# Altium PCB BUNE.PcbDoc (part 1 of 2)
Units mm, origin at the board's own origin, x right, y up, seen from the top; angles counter-clockwise.
Board outline 148 x 105 mm, 2 copper layers (Top Layer, Bottom Layer); 132 components, 91 nets, 460 pads, 94 vias.
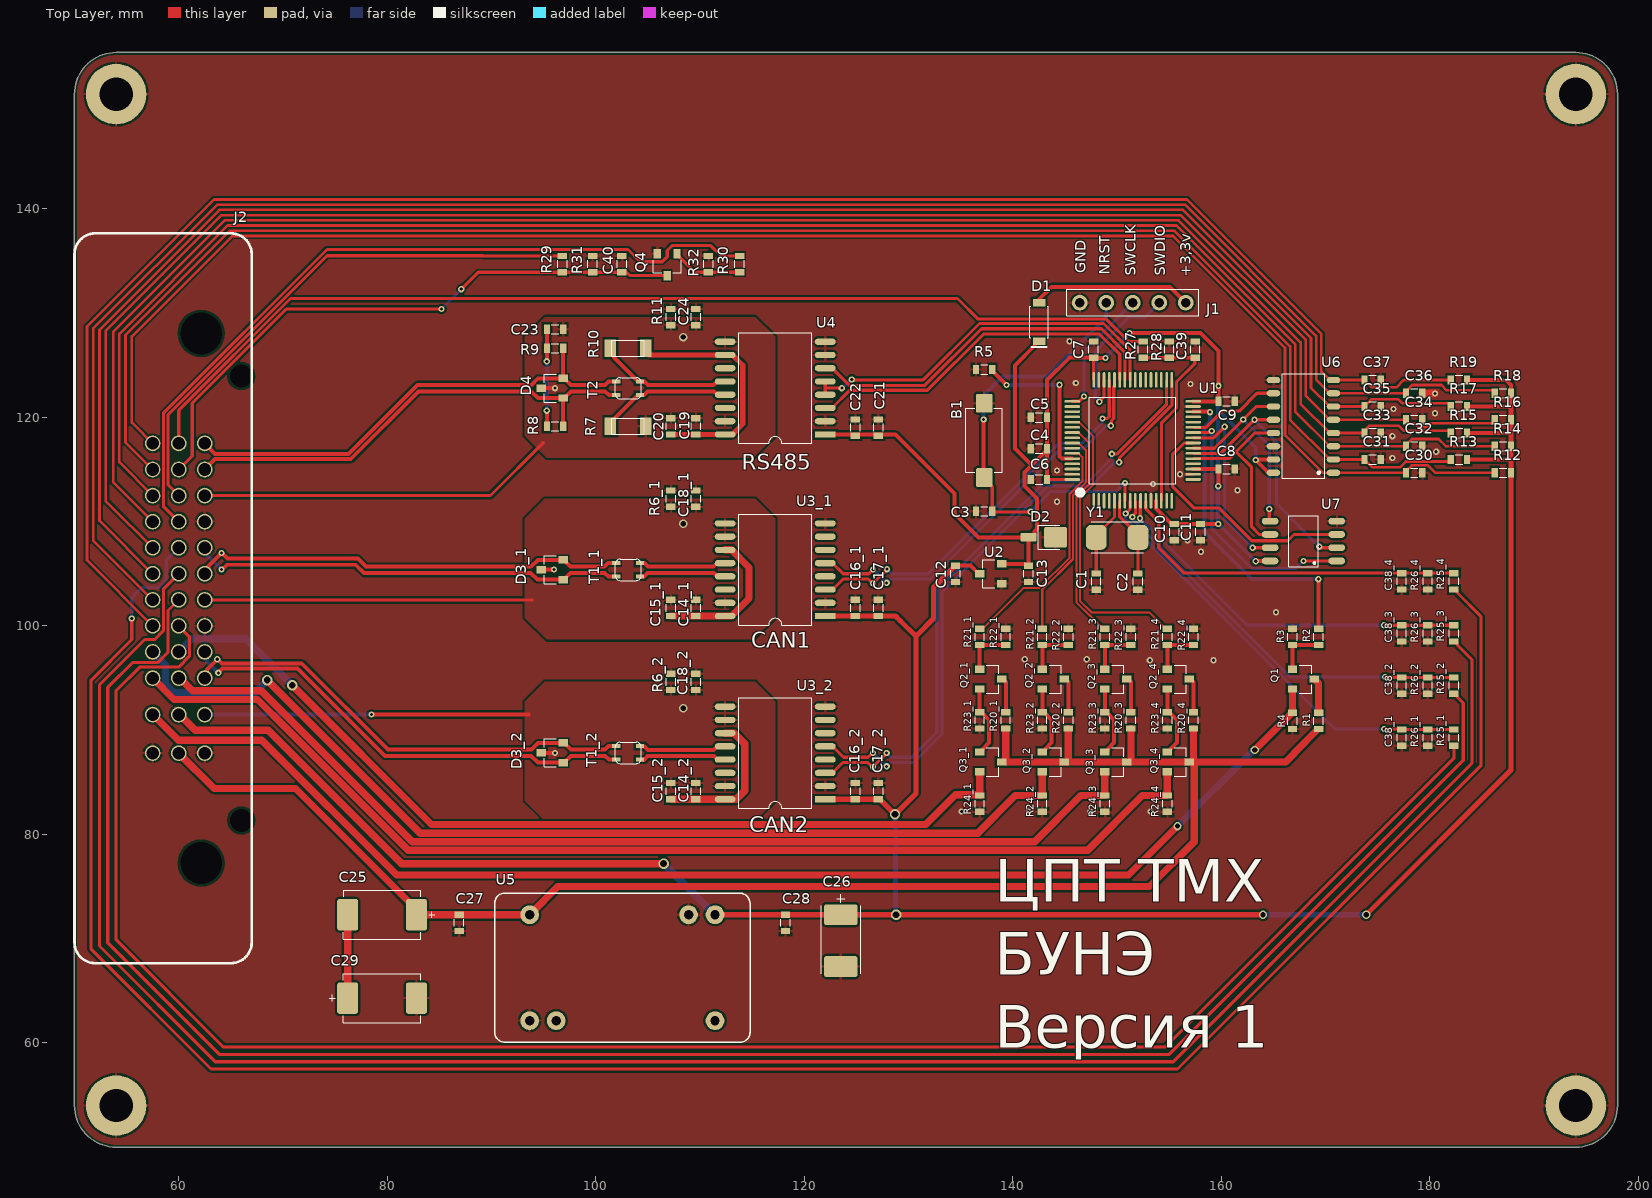
[diagram p0: Top Layer view]
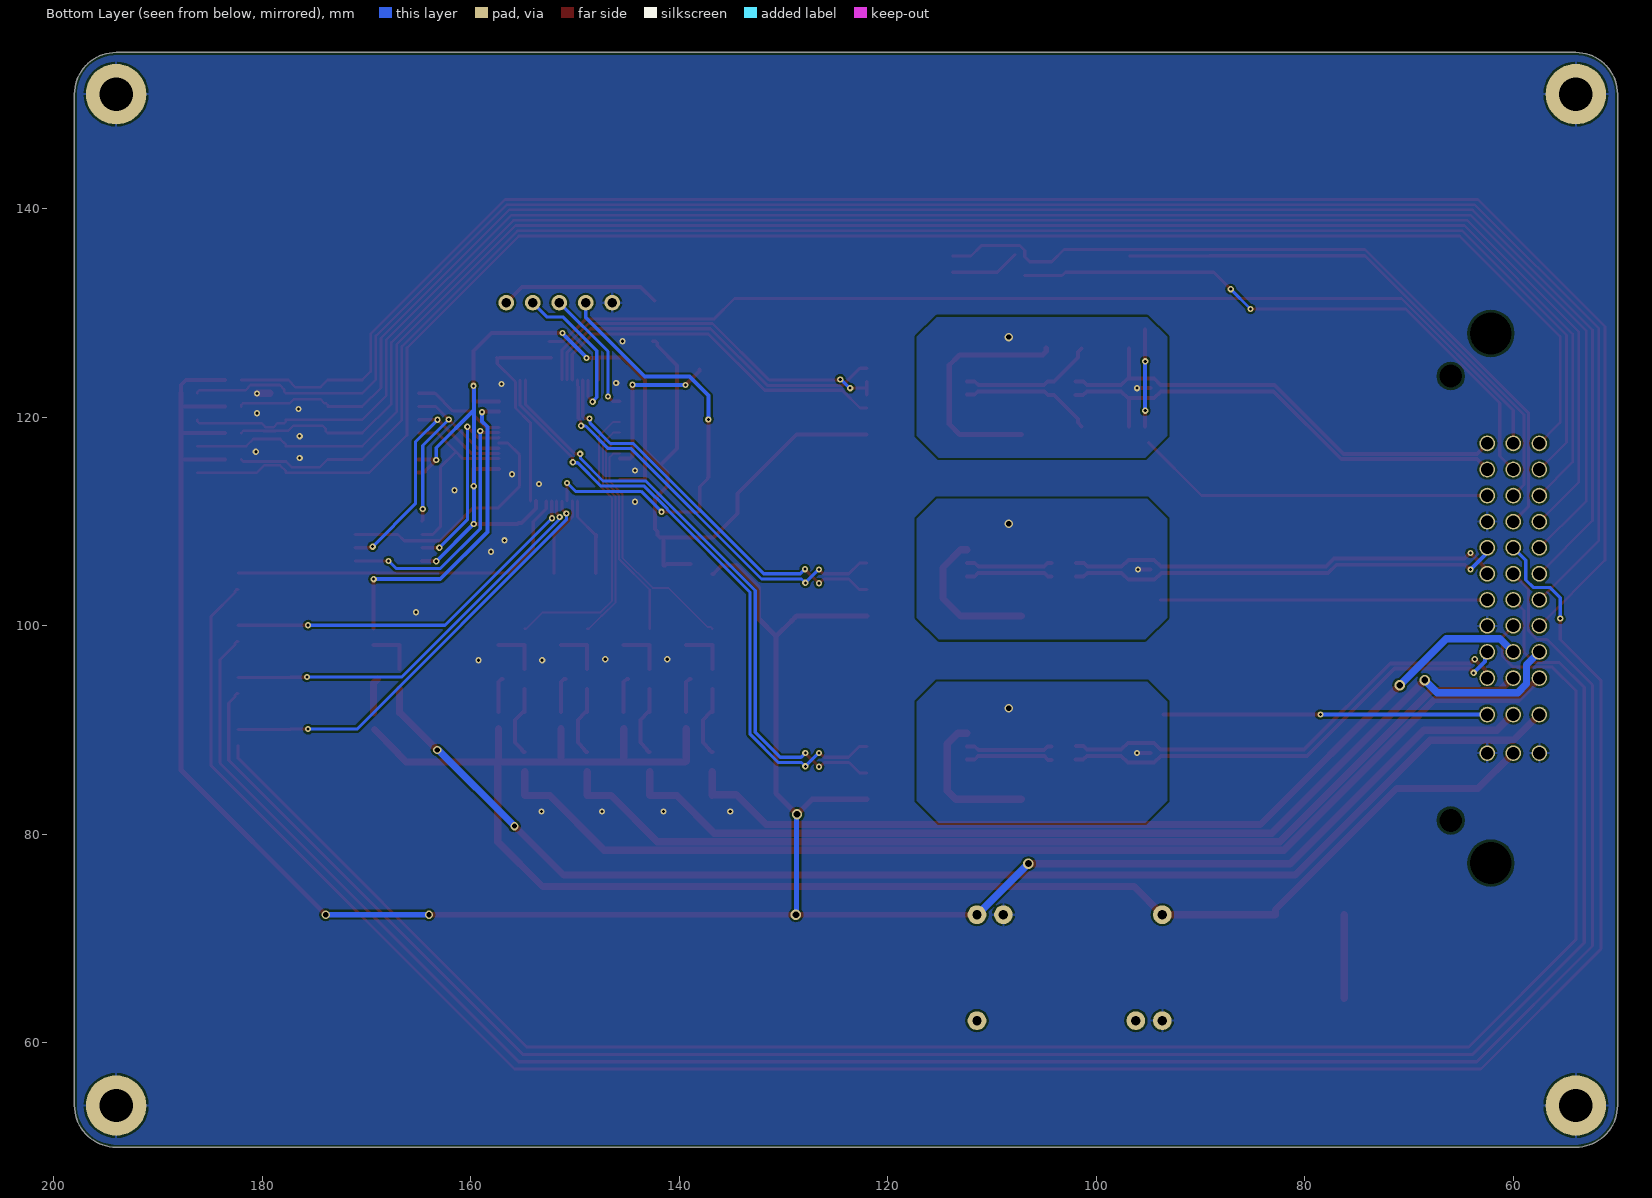
[diagram p1: Bottom Layer view, seen from below]
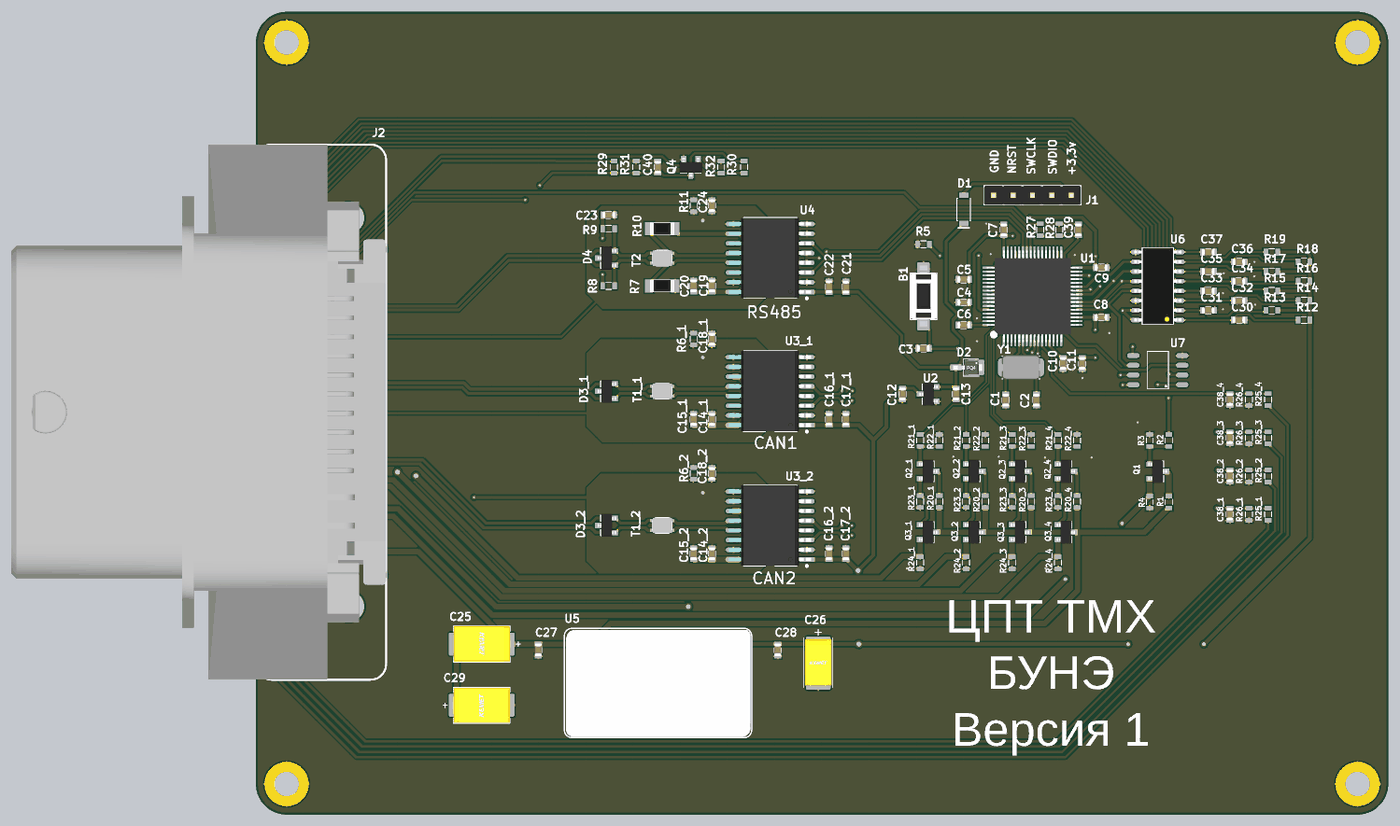
[diagram p2: 3D render of the assembled board from above, using the file's embedded part models]

## Layer stack, top to bottom
Top Solder: solder mask 0.0102, Solder Resist, Dk 3.5
Top Layer: signal copper 0.0356
Dielectric 1: dielectric 0.32, FR-4, Dk 4.8
Bottom Layer: signal copper 0.0356
Bottom Solder: solder mask 0.0102, Solder Resist, Dk 3.5

## Board outline
50,54 50,151 cw(c54,151) 54,155 194,155 cw(c194,151) 198,151 198,54 cw(c194,54) 194,50 54,50 cw(c54,54)

## Design rules (kind name [scope] priority, off if disabled: settings)
AcuteAngle [All] p1: minimum=3.50000000000000E+0001 checktracksonly=FALSE
BoardOutlineClearance "BoardOutlineClearance 1" [All] p1: gap=0.25 ignorepadtopadclearanceinfootprint=FALSE except(0: Arc-SplitContinuation Track-SplitContinuation SMDPad-SplitContinuation THPad-SplitContinuation Via-SplitContinuation Fill-SplitContinuation Poly-SplitContinuation Region-SplitContinuation Text-SplitContinuation) // Milling
Clearance "Clearance-1 1/2 Oz" [All] p1: gap=0.125 ignorepadtopadclearanceinfootprint=FALSE except(0.2: Arc-Fill Arc-Poly Track-Fill Track-Poly SMDPad-SMDPad SMDPad-Fill SMDPad-Poly THPad-Fill THPad-Poly Via-Fill Via-Poly Fill-Fill Fill-Poly Poly-Poly Poly-Region Poly-Text; 0.25: Arc-Hole Track-Hole SMDPad-Hole THPad-Hole Via-Hole Fill-Hole Poly-Hole Region-Hole Text-Hole) // Standart
ComponentClearance [All] p1: gap=0.1 collisioncheckmode=3 verticalgap=0.1 showdistances=FALSE
DiffPairsRouting "DiffPairsRouting 1/2 Oz" [All] p1: maxlimit=0.254 minlimit=0.125 mostfreqgap=0.254 toplayer_minwidth=0.125 toplayer_maxwidth=0.381 toplayer_prefwidth=0.381 bottomlayer_minwidth=0.125 bottomlayer_maxwidth=0.381 bottomlayer_prefwidth=0.381 maxuncoupledlength=12.7
Height [All] p1 off: minheight=0 maxheight=25.4 prefheight=12.7
HoleSize "Minimum HoleSize" [IsPad] p1: absolutevalues=TRUE maxlimit=5.9 minlimit=0.6 maxpercent=80.000 minpercent=20.000
HoleSize "Minimum HoleSize VIA 1" [IsVia] p2: absolutevalues=TRUE maxlimit=5.9 minlimit=0.3 maxpercent=80.000 minpercent=20.000 // Standart
HoleToHoleClearance Hole2HoleClearance [All] p1: gap=0.25 allowstackedmicrovias=FALSE
MinimumAnnularRing "Minimum AR VIA Standart" [All] p1: minimumring=0.15
MinimumAnnularRing "Minimum AR PAD Standart" [All] p2: minimumring=0.2
MinimumSolderMaskSliver "SolderMask Bridge Standart" [All] p1: minsoldermaskwidth=0.15 // All Masks
PlaneClearance "PlaneClearance-1 1/2 Oz" [All] p1: clearance=0.2 // Standart
PlaneConnect "TermalConnect-1 1/2 Oz" [All] p1: planeconnectstyle=Relief reliefexpansion=0.2 reliefentries=4 reliefconductorwidth=0.2 reliefairgap=0.2 // Standart
PolygonConnect "PolygonConnect-1 1/2 Oz" [All] p1: thpad.connectstyle=Relief thpad.reliefconductorwidth=0.254 thpad.reliefentries=4 thpad.polygonreliefangle="90 Angle" thpad.airgapwidth=0.2 smdpad.connectstyle=Relief smdpad.reliefconductorwidth=0.254 smdpad.reliefentries=4 smdpad.polygonreliefangle="90 Angle" smdpad.airgapwidth=0.2 via.connectstyle=Direct via.reliefconductorwidth=0.254 via.reliefentries=4 via.polygonreliefangle="90 Angle" via.airgapwidth=0.254 // Standart
RoutingCorners [All] p1 off: cornerstyle=45-Degree minsetback=2.54 maxsetback=2.54
RoutingVias [All] p1: holewidth=0.4 width=0.8 viastyle="Through Hole" minholewidth=0.3 minwidth=0.6 maxholewidth=5.9 maxwidth=8.9
SilkToSilkClearance Silk2SilkClearance [All] p1 off: silktosilkclearance=0.15
SilkToSolderMaskClearance Silk2SolderMaskClearance [IsPad] p1 off: minsilkscreentomaskgap=0.15 clearancetoexposedcopper=TRUE
SolderMaskExpansion SolderMaskExpansion-1 [All] p1: expansion=0.05 istentingtop=FALSE // Standart
UnRoutedNet [All] p1: checkbadconnections=TRUE
Width "Width 1/2 Oz" [All] p1: maxlimit=10 minlimit=0.125 preferedwidth=0.254 checkconnectedcopper=TRUE
18 further rules are at their usual default settings.

## Classes and differential pairs
net class CAN_L[1..2]: CAN_L1 CAN_L2
net class CAN_H[1..2]: CAN_H1 CAN_H2
channel class DigitalInput: DI1 DI2 DI3 DI4 DI5
net class DI24[1..4]: DI241 DI242 DI243 DI244
net class DI3.3[1..4]: DI3.31 DI3.32 DI3.33 DI3.34
component class DI4: C38_4 R25_4 R26_4
component class DI3: C38_3 R25_3 R26_3
component class DI2: C38_2 R25_2 R26_2
component class DI1: C38_1 R25_1 R26_1
channel class DigitalOut: DO1 DO2 DO3 DO4 DO5
channel class CAN: CAN1 CAN2
net class GND_CAN[1..2]: GND_CAN1 GND_CAN2
net class Gate[1..4]: Gate1 Gate2 Gate3 Gate4
net class DO[1..4]: DO1 DO2 DO3 DO4
net class CAN_TX[1..2]: CAN_TX1 CAN_TX2
net class CAN_RX[1..2]: CAN_RX1 CAN_RX2
component class Flash: U7
component class DO4: Q2_4 Q3_4 R20_4 R21_4 R22_4 R23_4 R24_4
component class DO3: Q2_3 Q3_3 R20_3 R21_3 R22_3 R23_3 R24_3
component class DO2: Q2_2 Q3_2 R20_2 R21_2 R22_2 R23_2 R24_2
component class DO1: Q2_1 Q3_1 R20_1 R21_1 R22_1 R23_1 R24_1
component class CAN2: C14_2 C15_2 C16_2 C17_2 C18_2 D3_2 R6_2 T1_2 U3_2
component class CAN1: C14_1 C15_1 C16_1 C17_1 C18_1 D3_1 R6_1 T1_1 U3_1
component class BUS1: C19 C20 C21 C22 C23 C24 D4 R7 R8 R9 R10 R11 T2 U4
component class ADC: C30 C31 C32 C33 C34 C35 C36 C37 R12 R13 R14 R15 R16 R17 R18 R19 U6
net class TEMP[1..8]: TEMP1 TEMP2 TEMP3 TEMP4 TEMP5 TEMP6 TEMP7 TEMP8
component class Main: C25 C26 C27 C28 C29 C40 J2 Q4 R29 R30 R31 R32 U5
component class MCU: B1 C1 C2 C3 C4 C5 C6 C7 C8 C9 C10 C11 C12 C13 C39 D1 D2 J1 Q1 R1 R2 R3 R4 R5 R27 R28 U1 U2 Y1

## Components (designator, comment, footprint, x,y, rotation, side; value= is the part's Value field where it differs from the comment)
B1 "But" "BUTTON 6x3.5" 137.25,121.355 r0 top
C1 "10pF" "0603 Capicator" 148,104.25 r270 top
C2 "10pF" "0603 Capicator" 152,104.25 r270 top
C3 "0.1uF" "0603 Capicator" 137.25,110.993 r180 top
C4 "4.7uF" "0603 Capicator" 142.5,117 r0 top
C5 "0.1uF" "0603 Capicator" 142.5,120 r0 top
C6 "0.1uF" "0603 Capicator" 142.5,114.043 r0 top
C7 "0.1uF" "0603 Capicator" 147.75,126.5 r270 top
C8 "0.1uF" "0603 Capicator" 160.5,115.043 r180 top
C9 "0.1uF" "0603 Capicator" 160.5,121.543 r180 top
C10 "10nF" "0603 Capicator" 155.5,109 r90 top
C11 "1uF" "0603 Capicator" 158,109 r90 top
C12 "1uF" "0603 Capicator" 134.5,105 r90 top
C13 "1uF" "0603 Capicator" 141.5,105 r90 top
C14_1 "0.1uF" "0603 Capicator" 109.6,101.72 r270 top (schematic designator C14)
C14_2 "0.1uF" "0603 Capicator" 109.6,84.145 r270 top (schematic designator C14)
C15_1 "10uF" "0603 Capicator" 107.2,101.72 r270 top (schematic designator C15)
C15_2 "10uF" "0603 Capicator" 107.2,84.145 r270 top (schematic designator C15)
C16_1 "0.1uF" "0603 Capicator" 124.9,101.72 r270 top (schematic designator C16)
C16_2 "0.1uF" "0603 Capicator" 124.9,84.145 r270 top (schematic designator C16)
C17_1 "10uF" "0603 Capicator" 127.1,101.72 r270 top (schematic designator C17)
C17_2 "10uF" "0603 Capicator" 127.1,84.145 r270 top (schematic designator C17)
C18_1 "1nF" "0603 Capicator" 109.6,112.2 r270 top (schematic designator C18)
C18_2 "1nF" "0603 Capicator" 109.6,94.625 r270 top (schematic designator C18)
C19 "0.1uF" "0603 Capicator" 109.6,119.145 r90 top
C20 "10uF" "0603 Capicator" 107.2,119.145 r90 top
C21 "10uF" "0603 Capicator" 127.1,119.025 r270 top
C22 "0.1uF" "0603 Capicator" 124.9,119.025 r90 top
C23 "4.7uF" "0603 Capicator" 96.095,128.45 r0 top
C24 "1nF" "0603 Capicator" 109.6,129.625 r90 top
C25 "150uF" TANTAL_D_CASE 79.5,72.3 r0 top
C26 "10uF" TANTAL_C_CASE 123.5,71.1 r90 top
C27 "2.2uF" "0603 Capicator" 86.9,71.52 r90 top
C28 "10uF" "0603 Capicator" 118.2,71.52 r90 top
C29 "150uF" TANTAL_D_CASE 79.5,64.3 r180 top
C30 "4.7uF" "0603 Capicator" 178.5,114.69 r180 top
C31 "4.7uF" "0603 Capicator" 174.5,115.96 r180 top
C32 "4.7uF" "0603 Capicator" 178.5,117.23 r180 top
C33 "4.7uF" "0603 Capicator" 174.5,118.5 r180 top
C34 "4.7uF" "0603 Capicator" 178.5,119.77 r180 top
C35 "4.7uF" "0603 Capicator" 174.5,121.04 r180 top
C36 "4.7uF" "0603 Capicator" 178.5,122.31 r180 top
C37 "4.7uF" "0603 Capicator" 174.5,123.58 r180 top
C38_1 "4.7uF" "0603 Capicator" 177.3,89.28 r90 top (schematic designator C38)
C38_2 "4.7uF" "0603 Capicator" 177.3,94.28 r90 top (schematic designator C38)
C38_3 "4.7uF" "0603 Capicator" 177.3,99.28 r90 top (schematic designator C38)
C38_4 "4.7uF" "0603 Capicator" 177.3,104.28 r90 top (schematic designator C38)
C39 "4.7uF" "0603 Capicator" 157.5,126.5 r270 top
C40 "10uF" "0603 Capicator" 102.5,134.7 r270 top
D1 "Diode" sod-123 142.513,131 r270 top
D2 "TVS 3.3V" DO-216AA 143,108.5 r180 top
D3_1 "TVS" SOT-23 96.875,104.435 r90 top (schematic designator D3)
D3_2 "TVS" SOT-23 96.875,86.881 r90 top (schematic designator D3)
D4 "TVS" SOT-23 96.875,121.85 r90 top
J1 "PLS 5x1" "PLS 5x1" 146.42,131 r0 top
J2 "Conn 36" Molex_477320361 65,117.5 r270 top
Q1 "MOSFET-N" SOT-23 166.825,95.848 r270 top
Q2_1 "MOSFET-N" SOT-23 136.825,95.848 r270 top (schematic designator Q2)
Q2_2 "MOSFET-N" SOT-23 142.825,95.848 r270 top (schematic designator Q2)
Q2_3 "MOSFET-N" SOT-23 148.825,95.848 r270 top (schematic designator Q2)
Q2_4 "MOSFET-N" SOT-23 154.825,95.848 r270 top (schematic designator Q2)
Q3_1 "MOSFET-N" SOT-23 136.825,87.898 r270 top (schematic designator Q3)
Q3_2 "MOSFET-N" SOT-23 142.825,87.898 r270 top (schematic designator Q3)
Q3_3 "MOSFET-N" SOT-23 148.825,87.898 r270 top (schematic designator Q3)
Q3_4 "MOSFET-N" SOT-23 154.825,87.898 r270 top (schematic designator Q3)
Q4 "MOSFET-N" SOT-23 107.8,135.7 r180 top
R1 "1k" "0603 Resistor" 169.325,90.888 r270 top
R2 "160R" "0603 Resistor" 169.325,98.948 r270 top
R3 "2.4k" "0603 Resistor" 166.825,98.948 r270 top
R4 "3.9k" "0603 Resistor" 166.825,90.888 r90 top
R5 "3.9k" "0603 Resistor" 137.25,124.593 r180 top
R6_1 "1M" "0603 Resistor" 107.2,112.2 r270 top (schematic designator R6)
R6_2 "1M" "0603 Resistor" 107.2,94.625 r270 top (schematic designator R6)
R7 "390R" "1206 RESISTOR" 103.1,119.145 r0 top
R8 "62R" "0603 Resistor" 96.095,119.145 r0 top
R9 "62R" "0603 Resistor" 96.095,126.625 r180 top
R10 "390R" "1206 RESISTOR" 103.1,126.625 r180 top
R11 "1M" "0603 Resistor" 107.2,129.625 r90 top
R12 "300R" "0603 Resistor" 187,114.69 r0 top
R13 "300R" "0603 Resistor" 182.78,115.96 r0 top
R14 "300R" "0603 Resistor" 187,117.23 r0 top
R15 "300R" "0603 Resistor" 182.78,118.5 r0 top
R16 "300R" "0603 Resistor" 187,119.77 r0 top
R17 "300R" "0603 Resistor" 182.78,121.04 r0 top
R18 "300R" "0603 Resistor" 187,122.31 r0 top
R19 "300R" "0603 Resistor" 182.78,123.58 r0 top
R20_1 "1k" "0603 Resistor" 139.325,90.948 r270 top (schematic designator R20)
R20_2 "1k" "0603 Resistor" 145.325,90.948 r270 top (schematic designator R20)
R20_3 "1k" "0603 Resistor" 151.325,90.948 r270 top (schematic designator R20)
R20_4 "1k" "0603 Resistor" 157.325,90.948 r270 top (schematic designator R20)
R21_1 "160R" "0603 Resistor" 136.825,98.948 r270 top (schematic designator R21)
R21_2 "160R" "0603 Resistor" 142.825,98.948 r270 top (schematic designator R21)
R21_3 "160R" "0603 Resistor" 148.825,98.948 r270 top (schematic designator R21)
R21_4 "160R" "0603 Resistor" 154.825,98.948 r270 top (schematic designator R21)
R22_1 "2.4k" "0603 Resistor" 139.325,98.948 r270 top (schematic designator R22)
R22_2 "2.4k" "0603 Resistor" 145.325,98.948 r270 top (schematic designator R22)
R22_3 "2.4k" "0603 Resistor" 151.325,98.948 r270 top (schematic designator R22)
R22_4 "2.4k" "0603 Resistor" 157.325,98.948 r270 top (schematic designator R22)
R23_1 "3.9k" "0603 Resistor" 136.825,90.948 r90 top (schematic designator R23)
R23_2 "3.9k" "0603 Resistor" 142.825,90.948 r90 top (schematic designator R23)
R23_3 "3.9k" "0603 Resistor" 148.825,90.948 r90 top (schematic designator R23)
R23_4 "3.9k" "0603 Resistor" 154.825,90.948 r90 top (schematic designator R23)
R24_1 "1k" "0603 Resistor" 136.825,82.948 r90 top (schematic designator R24)
R24_2 "1k" "0603 Resistor" 142.825,82.948 r90 top (schematic designator R24)
R24_3 "1k" "0603 Resistor" 148.825,82.948 r90 top (schematic designator R24)
R24_4 "1k" "0603 Resistor" 154.825,82.948 r90 top (schematic designator R24)
R25_1 "6.8k" "0603 Resistor" 182.3,89.28 r270 top (schematic designator R25)
R25_2 "6.8k" "0603 Resistor" 182.3,94.28 r270 top (schematic designator R25)
R25_3 "6.8k" "0603 Resistor" 182.3,99.28 r270 top (schematic designator R25)
R25_4 "6.8k" "0603 Resistor" 182.3,104.28 r270 top (schematic designator R25)
R26_1 "1k" "0603 Resistor" 179.8,89.28 r90 top (schematic designator R26)
R26_2 "1k" "0603 Resistor" 179.8,94.28 r90 top (schematic designator R26)
R26_3 "1k" "0603 Resistor" 179.8,99.28 r90 top (schematic designator R26)
R26_4 "1k" "0603 Resistor" 179.8,104.28 r90 top (schematic designator R26)
R27 "6.8k" "0603 Resistor" 152.5,126.5 r90 top
R28 "1k" "0603 Resistor" 155,126.5 r270 top
R29 "560k" "0603 Resistor" 96.8,134.7 r90 top
R30 "560k" "0603 Resistor" 113.8,134.7 r90 top
R31 "100k" "0603 Resistor" 99.7,134.7 r270 top
R32 "100k" "0603 Resistor" 110.8,134.7 r270 top
T1_1 "ACM2520" ACM2520 104.25,104.725 r180 top (schematic designator T1)
T1_2 "ACM2520" ACM2520 104.25,87.172 r180 top (schematic designator T1)
T2 "ACM2520" ACM2520 104.25,122.14 r180 top
U1 "STM32F105RCT6" LQFP64 151.5,117.793 r90 top
U2 "LDO 3V" SOT-23 138.925,104.05 r90 top
U3_1 "CAN Tranciever" SOIC16W 117.2,105.3 r180 top (schematic designator U3)
U3_2 "CAN Tranciever" SOIC16W 117.2,87.725 r180 top (schematic designator U3)
U4 "RS-485" SOIC16W 117.2,122.725 r180 top
U5 "DC/DC 24/5" VDRI10(6) 93.66,62.14 r0 top
U6 "ADC 8-channel" SOIC-16 170.75,114.69 r90 top
U7 "Flash" SOIC-8-0 171.075,106.23 r180 top
Y1 "8MHz" NX5032GA 150,108.5 r180 top

## Footprints (in the part's own frame and the unit in brackets; to place one, negate y for a bottom-side part, rotate by r counter-clockwise, add the part's x,y. Pads: shape width x height; smd on the part's side, far side on the other; paste and mask are expansions set on the pad)
"0603 Capicator" [mm]
  rect 0.6x0.9 smd: 1(-0.78,0) 2(0.78,0)
  silkscreen extent -0.35,-0.45 0.35,0.45, body extent -0.82,-0.45 0.88,0.45, height 0.9
"0603 Resistor" [mm]
  rect 0.6x0.9 smd: 1(-0.78,0) 2(0.78,0)
  silkscreen extent -0.35,-0.45 0.35,0.45, body extent -0.85,-0.45 0.85,0.45, height 0.55
"1206 RESISTOR" [mm] "smd"
  rect 1.1x1.7 smd: 1(-1.7,0) 2(1.7,0)
  silkscreen extent -1.55,-0.77 1.55,0.77, body extent -1.55,-0.77 1.55,0.78, height 0.55
ACM2520 [mm]
  rect 0.8x0.4 smd: 1(0,0) 2(2.3,0) 3(0,-1.3) 4(2.3,-1.3)
  silkscreen extent -0.13,-1.68 2.4,0.38, body extent -0.11,-1.64 2.39,0.36, height 1.24
"BUTTON 6x3.5" [mm]
  rrect20% 1.6x1.8 smd: 1(0,0) 2(0,-7.125)
  silkscreen extent -1.75,-6.63 1.75,-0.48, body extent -1.75,-7.52 1.75,0.48, height 4.3
DO-216AA [mm]
  rrect20% 2.2x2 smd: 1(-1.1,0)
  rrect20% 1.5x0.8 smd: 2(1.5,0)
  silkscreen extent -1.5,-1.15 0.58,1.15, body extent -1.91,-0.93 1.85,0.98, height 1.02
LQFP64 [mm]
  oval 1.5x0.254 smd paste+0 mask+0.02: 1(-5.8,3.75) 2(-5.8,3.25) 3(-5.8,2.75) 4(-5.8,2.25) 5(-5.8,1.75) 6(-5.8,1.25) 7(-5.8,0.75) 8(-5.8,0.25) 9(-5.8,-0.25) 10(-5.8,-0.75) 11(-5.8,-1.25) 12(-5.8,-1.75) 13(-5.8,-2.25) 14(-5.8,-2.75) 15(-5.8,-3.25) 16(-5.8,-3.75) 33(5.8,-3.75) 34(5.8,-3.25) 35(5.8,-2.75) 36(5.8,-2.25) 37(5.8,-1.75) 38(5.8,-1.25) 39(5.8,-0.75) 40(5.8,-0.25) 41(5.8,0.25) 42(5.8,0.75) 43(5.8,1.25) 44(5.8,1.75) 45(5.8,2.25) 46(5.8,2.75) 47(5.8,3.25) 48(5.8,3.75)
  oval 0.254x1.5 smd paste+0 mask+0.02: 17(-3.75,-5.8) 18(-3.25,-5.8) 19(-2.75,-5.8) 20(-2.25,-5.8) 21(-1.75,-5.8) 22(-1.25,-5.8) 23(-0.75,-5.8) 24(-0.25,-5.8) 25(0.25,-5.8) 26(0.75,-5.8) 27(1.25,-5.8) 28(1.75,-5.8) 29(2.25,-5.8) 30(2.75,-5.8) 31(3.25,-5.8) 32(3.75,-5.8) 49(3.75,5.8) 50(3.25,5.8) 51(2.75,5.8) 52(2.25,5.8) 53(1.75,5.8) 54(1.25,5.8) 55(0.75,5.8) 56(0.25,5.8) 57(-0.25,5.8) 58(-0.75,5.8) 59(-1.25,5.8) 60(-1.75,5.8) 61(-2.25,5.8) 62(-2.75,5.8) 63(-3.25,5.8) 64(-3.75,5.8)
  silkscreen extent -5.2,-4.15 4.15,5.25, body extent -6,-6.02 6,5.98, height 1.56
Molex_477320361 [mm] "Molex PCB Header 48 pin"
  round 1.5 hole 1.2: 2A(0,-2.5) 2B(2.5,-2.5) 2C(5,-2.5) 2D(7.5,-2.5) 2E(10,-2.5) 2F(12.5,-2.5) 2G(15,-2.5) 2H(17.5,-2.5) 2J(20,-2.5) 2K(22.5,-2.5) 2L(26,-2.5) 2M(29.7,-2.5) 3A(0,-5) 3B(2.5,-5) 3C(5,-5) 3D(7.5,-5) 3E(10,-5) 3F(12.5,-5) 3G(15,-5) 3H(17.5,-5) 3J(20,-5) 3K(22.5,-5) 3L(26,-5) 3M(29.7,-5) 4A(0,-7.5) 4B(2.5,-7.5) 4C(5,-7.5) 4D(7.5,-7.5) 4E(10,-7.5) 4F(12.5,-7.5) 4G(15,-7.5) 4H(17.5,-7.5) 4J(20,-7.5) 4K(22.5,-7.5) 4L(26,-7.5) 4M(29.7,-7.5)
  round 1.524 hole 4: 4(-10.55,-2.85) 7(40.25,-2.85)
  round 1.524 hole 2.2: 5(-6.45,1) 6(36.15,1)
  silkscreen extent -20.15,-15 49.85,2, body extent -20.1,-47 49.81,2, height 27.6
NX5032GA [mm] "Crystal"
  rrect50% 2x2.4 smd: 1(-2,0) 2(2,0)
  silkscreen extent -2.5,-1.5 2.5,1.5, body extent -2.5,-1.6 2.5,1.6, height 1.5
"PLS 5x1" [mm] "Connector; Header; 5 Position"
  round 1.5 hole 0.9: 1(0,0) 2(2.54,0) 3(5.08,0) 4(7.62,0) 5(10.16,0)
  silkscreen extent -1.27,-1.27 11.43,1.27, body extent -1.28,-1.28 11.42,1.26, height 8.54
sod-123 [mm]
  rect 0.7x1.2 smd: 1(0,0) 2(3.7,0)
  silkscreen extent 0.35,-0.9 4.25,0.87, body extent 0,-0.8 3.7,0.8
SOIC16W [mm]
  rect 2x0.6 smd: 1(-4.81,4.36)
  oval 2x0.6 smd: 2(-4.81,3.09) 3(-4.81,1.82) 4(-4.81,0.55) 5(-4.81,-0.72) 6(-4.81,-1.99) 7(-4.81,-3.26) 8(-4.81,-4.53) 9(4.79,-4.53) 10(4.79,-3.26) 11(4.79,-1.99) 12(4.79,-0.72) 13(4.79,0.55) 14(4.79,1.82) 15(4.79,3.09) 16(4.79,4.36)
  round 0.5 on Top Overlay mask+0.051: ""(-4.8,5.2)
  silkscreen extent -3.5,-5.39 3.48,5.21, body extent -5.35,-5.35 5.35,5.15, height 2.65
SOIC-8-0 [mm]
  oval 1.6x0.65 smd: 1(0,0) 2(0,-1.27) 3(0,-2.54) 4(0,-3.81) 5(6.4,-3.81) 6(6.4,-2.54) 7(6.4,-1.27) 8(6.4,0)
  silkscreen extent 1.8,-4.35 4.6,0.55, body extent 0.34,-4.35 6.11,0.55, height 1.45
SOIC-16 [mm]
  oval 0.6x1.3 smd paste+0 mask+0.1: 1(0,0) 2(1.27,0) 3(2.54,0) 4(3.81,0) 5(5.08,0) 6(6.35,0) 7(7.62,0) 8(8.89,0) 9(8.89,5.75) 10(7.62,5.75) 11(6.35,5.75) 12(5.08,5.75) 13(3.81,5.75) 14(2.54,5.75) 15(1.27,5.75) 16(0,5.75)
  silkscreen extent -0.55,0.82 9.48,4.92, body extent -0.53,-0.19 9.44,5.94, height 1.78
SOT-23 [mm]
  rect 0.7x0.9 smd: 1(0,0) 2(1.9,0) 3(0.95,2.1)
  silkscreen extent -0.4,0.65 2.3,1.83, body extent -0.55,-0.17 2.45,2.23, height 1.1
TANTAL_C_CASE [mm]
  rrect20% 2x3.2 smd: 1(-3.775,0) 2(1.2,0)
  silkscreen extent -4.45,-1.9 3.15,1.88, body extent -4.35,-1.75 1.95,1.75, height 2.81
TANTAL_D_CASE [mm]
  rrect20% 2x3 smd: 1(-3.3,0) 2(3.3,0)
  silkscreen extent -3.7,-2.35 5.05,2.36, body extent -3.8,-2.28 3.8,2.32, height 3.11
VDRI10(6) [mm]
  round 1.8 hole 0.9: 1(0,0) 2(2.54,0) 8(17.78,0) 9(17.78,10.16) 10(15.24,10.16) 16(0,10.16)
  silkscreen extent -3.36,-2.07 21.14,12.23, body extent -3.12,-1.97 20.98,12.03, height 8.6

## Part data
B1: library part "Button 2 Conn", "Button 2 Conn SMD", Manufacturer="KLS electronic co ltd", Part Number=L-KLS7-TS3608-5.0-180, ComponentLink1Description=Chip&Dip, ComponentLink1URL=https://www.chipdip.ru/product/kls7-ts3608-5.0-180-td-02xa, Type=Button
C1 C2: library part "Cap 10pF (0603)", "10pF NP0 50V 5% 0603", Manufacturer="Murata Manufacturing", Part Number=GRM1885C1H100JA01D, ComponentLink1Description=Chip&Dip, ComponentLink1URL=https://www.chipdip.ru/product/grm1885c1h100j, Type=Capacitor
C3 C5 C6 C7 C8 C9 C14_1 C14_2 C16_1 C16_2 C19 C22: library part "Cap 0.1uF (0603)", "0.1uF X7R 16V 10% 0603", Manufacturer="Murata Manufacturing", Part Number=GRM188R71C104KA01D, ComponentLink1Description=Chip&Dip, ComponentLink1URL=https://www.chipdip.ru/product/grm188r71c104ka01d, Type=Capacitor
C4 C23 C30 C31 C32 C33 C34 C35 C36 C37 C38_1 C38_2 C38_3 C38_4 C39: library part "Cap 4.7uF (0603)", "4.7uF X5R 25V 10% 0603", Manufacturer="Murata Manufacturing", Part Number=GRM188R61E475KE11D, ComponentLink1Description=Chip&Dip, ComponentLink1URL=https://www.chipdip.ru/product0/9000348448, Type=Capacitor
C10: library part "Cap 10nF (0603)", "10nF X7R  100V 10% 0603", Manufacturer="Murata Manufacturing", Part Number=GRM188R72A103KA01D, ComponentLink1Description=Chip&Dip, ComponentLink1URL=https://www.chipdip.ru/product/grm188r72a103ka01d, Type=Capacitor
C11 C12 C13: library part "Cap 1uF (0603)", "1uF X5R 25V 10% 0603", Manufacturer="Murata Manufacturing", Part Number=GRM188R61E105KAADD, ComponentLink1Description=Chip&Dip, ComponentLink1URL=https://www.chipdip.ru/product/grm188r61e105k, Type=Capacitor
C15_1 C15_2 C17_1 C17_2 C20 C21 C28 C40: library part "Cap 10uF (0603)", "10uF X5R 25V 20% 0603", Manufacturer="Murata Manufacturing", Part Number=GRM188R61E106M, ComponentLink1Description=Chip&Dip, ComponentLink1URL=https://www.chipdip.ru/product/grm188r61e106m, Type=Capacitor
C18_1 C18_2 C24: library part "Cap 1nF (0603)", "X7R 1nF 100V 10% 0603", Manufacturer="Murata Manufacturing", Part Number=GRM188R72A102KA01D, ComponentLink1Description=Chip&Dip, ComponentLink1URL=https://www.chipdip.ru/product/grm188r72a102ka01d, Type=Capacitor
C25 C29: library part "Cap Tantal 150uF (SMDD)", "TECAP, 150uF, 16V, case D, 10%", Manufacturer=Vishay, Part Number=293D157X9010D2TE3, ComponentLink1Description=Chip&Dip, ComponentLink1URL=https://www.chipdip.ru/product0/8018239339, Type=Capacitor
C26: library part "Cap Tantal 10uF (SMDC)", "TECAP, 10uF, 35V, case C, 10%", Manufacturer=China, Part Number=TECAP10/35VC10, ComponentLink1Description=Chip&Dip, ComponentLink1URL=https://www.chipdip.ru/product/tecap-10-mkf-35-v-tip-c-10, Type=Capacitor
C27: library part "Cap 2.2uF (0603)", "2.2uF X5R 50V 10% 0603", Manufacturer="Murata Manufacturing", Part Number=GRM188R61H225KE11D, ComponentLink1Description=Chip&Dip, ComponentLink1URL=https://www.chipdip.ru/product/grm188r61h225ke11d-murata, Type=Capacitor
D1: library part "Diode Schottky (SOD-123)", "0.5 A, Low Forward Voltage less than 385 mV, 400 mW Power Dissipation Package", Manufacturer="ON Semiconductor", Part Number=MBR0520L, ComponentLink1Description=DataSheet, ComponentLink1URL=http://www.farnell.com/datasheets/1875336.pdf, ComponentLink2Description=Chip&Dip, ComponentLink2URL=https://www.chipdip.ru/product/mbr0520l, Type=Diode
D2: library part "TVS Diode 3.3V [SM2T]", "High peak pulse power: 200 W (10/1000 μs)", Manufacturer=STMicroelectronics, Part Number=SM2T3V3A, ComponentLink1Description=DataSheet, ComponentLink1URL=https://www.st.com/resource/en/datasheet/sm2t3v3a.pdf, ComponentLink2Description=Chip&Dip, ComponentLink2URL=https://www.chipdip.ru/product0/8283670575, Type=Diode
D3_1 D3_2 D4: library part "TVS Diode Arrays", "The SM24CANB TVS Diode Array is designed to protect automotive Controller Area Network (CAN) lines from damage due to electrostatic discharge (ESD), electrical fast transient (EFT), and other overvoltage transients.", Manufacturer=Littelfuse, Part Number=SM24CANB-02HTG, ComponentLink1Description=DataSheet, ComponentLink1URL=https://m.littelfuse.com/~/media/electronics/datasheets/tvs_diode_arrays/littelfuse_tvs_diode_array_sm24canb_datasheet.pdf.pdf, ComponentLink2Description=Chip&Dip, ComponentLink2URL=https://www.chipdip.ru/product1/8001779022, Type=Diode
J1: library part "Conn 5 (PLS)", "Header, 5-Pin"
J2: library part "Conn 36 (Molex)", "Molec 36 pin PCB Header 477320361", Manufacturer=Molex, Part Number=477320361, ComponentLink1Description=ChipDip, ComponentLink1URL=https://www.chipdip.ru/product0/8004298252, ComponentLink2Description=Promelec, ComponentLink2URL=https://www.promelec.ru/product/427663/, ComponentLink3Description=Datasheet, ComponentLink3URL=https://static.chipdip.ru/lib/848/DOC011848025.pdf, Type=Connector
Q1 Q2_1 Q2_2 Q2_3 Q2_4 Q3_1 Q3_2 Q3_3 Q3_4 Q4: library part "MOSFET-N [IRLML]", "VDS 30V,  VGS Max ± 20V, RDS 27-40mΩ,", Manufacturer="Infineon Technologies", Part Number=IRLML0030TRPBF, ComponentLink1Description=DataSheet, ComponentLink1URL=https://static.chipdip.ru/lib/300/DOC000300382.pdf, ComponentLink2Description=Chip&Dip, ComponentLink2URL=https://www.chipdip.ru/product/irlml0030trpbf, Type=Transistor
R1 R20_1 R20_2 R20_3 R20_4 R24_1 R24_2 R24_3 R24_4 R26_1 R26_2 R26_3 R26_4 R28: library part "Res 1k (0603)", "0.1W 0603 1k, 1%", Manufacturer=Taiwan, Part Number=RC0603FR-071KL, ComponentLink1Description=Chip&Dip, ComponentLink1URL=https://www.chipdip.ru/product0/9000079676, Type=Resistor
R2 R21_1 R21_2 R21_3 R21_4: library part "Res 160R (0603)", "0.1W 0603 160R, 1%", Manufacturer=Taiwan, Part Number=RC0603FR-07160RL, ComponentLink1Description=Chip&Dip, ComponentLink1URL=https://www.chipdip.ru/product/0.1w-0603-160-om-1, Type=Resistor
R3 R22_1 R22_2 R22_3 R22_4: library part "Res 2.4k (0603)", "0.1W 0603 2.4k, 1%", Manufacturer=Taiwan, Part Number=RC0603FR-072K4L, ComponentLink1Description=Chip&Dip, ComponentLink1URL=https://www.chipdip.ru/product0/9000079721, Type=Resistor
R4 R5 R23_1 R23_2 R23_3 R23_4: library part "Res 3.9k (0603)", "0.1W 0603 3.9k, 1%", Manufacturer=Taiwan, Part Number=RC0603FR-073K9L, ComponentLink1Description=Chip&Dip, ComponentLink1URL=https://www.chipdip.ru/product0/9000079726, Type=Resistor
R6_1 R6_2 R11: library part "Res 1M (0603)", "0.1W 0603 1M, 1%", Manufacturer=Taiwan, Part Number=RC0603FR-071ML, ComponentLink1Description=Chip&Dip, ComponentLink1URL=https://www.chipdip.ru/product0/9000079784, Type=Resistor
R7 R10: library part "Res 390R (1206)", "0.25W 1206 390R", Manufacturer=Taiwan, Part Number=RC1206JR-07390KL, ComponentLink1Description=Chip&Dip, ComponentLink1URL=https://www.chipdip.ru/product0/8023504304, Type=Resistor
R8 R9: library part "Res 62R (0603)", "0.1W 0603 62R, 1%", Manufacturer=Taiwan, Part Number=RC0603FR-0762RL, ComponentLink1Description=Chip&Dip, ComponentLink1URL=https://www.chipdip.ru/product0/9000079611, Type=Resistor
R12 R13 R14 R15 R16 R17 R18 R19: library part "Res 300R (0603)", "0.1W 0603 300R, 1%", Manufacturer=Taiwan, Part Number=RC0603FR-07360RL, ComponentLink1Description=Chip&Dip, ComponentLink1URL=https://www.chipdip.ru/product0/9000079629, Type=Resistor
R25_1 R25_2 R25_3 R25_4 R27: library part "Res 6.8k (0603)", "0.1W 0603 6.8k, 1%", Manufacturer=Taiwan, Part Number=RC0603FR-076K8L, ComponentLink1Description=Chip&Dip, ComponentLink1URL=https://www.chipdip.ru/product/0.1w-0603-6.8-kom-1, Type=Resistor
R29 R30: library part "Res 560k (0603)", "0.1W 0603 560k, 1%", Manufacturer=Taiwan, Part Number=RC0603FR-07560KL, ComponentLink1Description=Chip&Dip, ComponentLink1URL=https://www.chipdip.ru/product0/9000079778, Type=Resistor
R31 R32: library part "Res 100k (0603)", "0.1W 0603 100k, 1%", Manufacturer=Taiwan, Part Number=RC0603FR-07100KL, ComponentLink1Description=Chip&Dip, ComponentLink1URL=https://www.chipdip.ru/product0/9000079760, Type=Resistor
T1_1 T1_2 T2: "Common mode filters / Automotive signal line (for power train/safety)", Manufacturer=TDK, Part Number=ACM2520-301-2P-T002, ComponentLink1Description=DataSheet, ComponentLink1URL=https://product.tdk.com/system/files/dam/doc/product/emc/emc/cmf_cmc/catalog/cmf_commercial_signal_acm2520_en.pdf, ComponentLink2Description=ChipDip, ComponentLink2URL=https://www.chipdip.ru/product0/8008480337?ysclid=lw4t4jsj9a923851487, Type=Inductor
U1: "MCU ARM 256KB FLASH MEM 64-LQFP", Manufacturer=STMicroelectronics, ComponentLink1Description=DataSheet, ComponentLink1URL=https://static.chipdip.ru/lib/375/DOC011375072.pdf, ComponentLink2Description=Chip&Dip, ComponentLink2URL=https://www.chipdip.ru/product/stm32f105rct6, Part Number=STM32F105RCT6, Type=IC
U2: library part "LDO 3,3V [MCP]", "MCP1702 Low Dropout Voltage Regulator. The input operating range is specifiedfrom 2.7V to 13.2V", Manufacturer=Microchip, Part Number=MCP1702T-3002E/CB, ComponentLink1Description=DataSheet, ComponentLink1URL=https://static.chipdip.ru/lib/986/DOC003986671.pdf, ComponentLink2Description=Chip&Dip, ComponentLink2URL=https://www.chipdip.ru/product/mcp1702t-3002e-cb-microchip
U3_1 U3_2: library part TDA51SCANHC, "Isolated CAN Tranciever", Manufacturer="Mornsun Power", ComponentLink1Description=ChipDip, ComponentLink1URL=https://www.chipdip.ru/product0/8024219767, ComponentLink2Description=Datasheet, ComponentLink2URL=https://static.chipdip.ru/lib/623/DOC041623283.pdf, Part Number=TDA51SCANHC, Type=IC
U4: library part TDA51S485HC, "Isolated RS-485 Half-Duplex tranciever", Manufacturer=Mornsun, ComponentLink1Description=ChipDip, ComponentLink1URL=https://www.chipdip.ru/product0/8009281357, ComponentLink2Description=Datasheet, ComponentLink2URL=https://www.mornsun-power.com/html/pdf/TDA51S485HC.html, Part Number=TDA51S485HC, Type=IC
U5: library part VDRI10B05, "DC/DC converter 24/5 10W", Manufacturer=Voltbricks, ComponentLink2Description=Datasheet, ComponentLink2URL=https://support.voltbricks.ru/datasheets/VDRI10.pdf?1689593019, Part Number=VDRI10B05, Type=IC
U6: library part MCP3008-I/SL, "A/D converter with SPI serial interface", Manufacturer=Microchip, ComponentLink1Description=ChipDip, ComponentLink1URL=https://www.chipdip.ru/product/mcp3008-i-sl, ComponentLink2Description=Datadheet, ComponentLink2URL=https://static.chipdip.ru/lib/527/DOC011527685.pdf, Part Number=MCP3008-I/SL, Type=IC
U7: library part AT25DF32A-SH-T, "32MBit Flash memore 100 MHz", Manufacturer="Adesto Technologies", ComponentLink1Description=Dayasheet, ComponentLink1URL=https://static.chipdip.ru/lib/314/DOC000314047.pdf, ComponentLink2Description=ChipDip, ComponentLink2URL=https://www.chipdip.ru/product/at25df321a-sh-t?from=suggest_product, Part Number=AT25DF32A-SH-T, Type=IC
Y1: library part "Crystal 8MHz", "Crystal NX5032GA", Manufacturer="Nihon Dempa Kogio (NDK)", Part Number=NX5032GA-8MHz, ComponentLink1Description=Chip&Dip, ComponentLink1URL=https://www.chipdip.ru/product0/9000523954, Type=Crystal

## Free pads (board coordinates)
  round 5.8 hole 3.2: 0(54,54) 0(54,151) 0(194,54) 0(194,151)

## Via types
v1: diameter 0.6, hole 0.3, Top Layer to Bottom Layer, tented both sides, 82 vias
v2: diameter 0.8, hole 0.5, Top Layer to Bottom Layer, tented both sides, 7 vias
v3: diameter 1, hole 0.65, Top Layer to Bottom Layer, tented both sides, 5 vias

## Nets (pads, with @x,y where several pads share a name; then routed paths per layer and width w, separated by ;. In a path a pad name is that pad's centre, name@x,y a point inside that pad or via, vN(x,y) a via of type N, cw(c..) or ccw(c..) an arc to the next point about the centre after c; other vN are vias at no path point)
+3,3V: C4.2 C5.2 C6.2 C7.2 C8.2 C9.2 C10.2 C11.2 C13.2 C21.2 C22.1 D1.2 D2.2 U1.13 U1.19 U1.32 U1.48 U1.64 U2.2 U4.1 U6.15 U6.16 U7.8 | length 135.4
  Top Layer w0.3: C6.2@143.323,114.043 U1.64 ; U1.48 C7.2
  Top Layer w0.381: U4.1 128.735,118.365 134.4,112.7 134.4,110.8 136.7,108.5 D2.2 ; U2.2 141.18,105.95 141.35,105.78 C13.2 D2.2 ; 141.725,115.475 140.2,117 140.2,124.987 142.103,126.89 142.103,127.14 142.263,127.3 D1.2 ; C4.2@143.28,117.15 C4.2 C4.2@143.28,116.85 ; C4.2@143.28,117.33 C5.2 143.28,123.58 145.42,125.72 C7.2 147.76,125.71 148.89,125.71 v1(148.9,125.7) ; C6.2@143.323,114.043 143.28,114 C6.2 C4.2@143.28,116.85 ; v1(151.2,128.1) 158,128.1 159.737,126.363 v1(159.737,123.026) ; U1.13 153.75,111.244 154.067,110.927 154.073,110.927 155.111,109.889 155.39,109.889 C10.2 C11.2 158.006,109.774 159.563,109.774 v1@159.569,109.769 ; U1.19 C8.2@159.71,115.043 ; U1.32 C9.2 159.71,121.553 v1@159.71,122.99 ; v1(159.7,113.4) 159.71,113.41 C8.2@159.71,115.043 ; C8.2@159.71,115.09 C8.2@159.71,115.043 ; C8.2 C8.2@159.71,115.043 ; v1(163.3,106.2) 163.315,106.215 164.66,106.215 U7.8 ; U6.16 164.591,114.69 164.481,114.799 164.401,114.799 v1(163.3,115.9) 163.359,115.9 163.419,115.96 U6.15 ; D2.2 141.85,108.5 142.06,108.71 142.06,109.06 142.3,109.3 142.3,112.2 141.1,113.4 141.1,114.7 143.14,116.74 143.171,116.74 C4.2@143.28,116.85
  Bottom Layer w0.381: v1(148.9,125.7) 148.9,125.75 151.2,128.05 v1(151.2,128.1) ; v1@159.7,123 159.7,120.687 ; v1(163.3,106.2) 163.284,106.2 159.716,109.769 v1(159.7,109.769) v1(159.7,113.4) 159.7,120.687 ; v1(163.3,115.9) 163.3,117.087 159.7,120.687
+5V: C12.2 C16_1.2 C16_2.2 C17_1.2 C17_2.2 C26.2 C28.2 J2.3L R12.2 R13.2 R14.2 R15.2 R16.2 R17.2 R18.2 R19.2 U2.3 U3_1.1 U3_2.1 U5.9 | length 250.8
  Top Layer w0.381: C12.2 135.945,105.78 136.725,105 U2.3 ; R13.2 187.78,115.96 ; R15.2 187.78,118.5 ; R17.2 187.78,121.04 ; R19.2 187.32,123.58 187.78,123.12 R18.2
  Top Layer w0.5: U5.9 C28.2 C26.2 v3(128.8,72.3) v2(164,72.3) ; U3_2.1 C16_2.2 C17_2.2 127.25,83.365 128.69,81.925 v3(128.7,81.925) 130.7,83.925 130.7,99 ; U3_1.1 C16_1.2 C17_1.2 128.76,100.94 129.21,100.49 130.7,99 ; C12.2 132.4,103.68 132.4,100.7 130.7,99 ; v2(173.9,72.3) 187.78,86.18 R12.2 187.78,115.96 R14.2 187.78,118.5 R16.2 187.78,121.04 R18.2
  Top Layer w0.7: J2.3L@59.993,91.347 60.253,91.347 61.6,90 68.6,90 81.4,77.2 v3(106.5,77.2)
  Bottom Layer w0.5: v3(128.7,81.925) 128.75,81.875 128.75,72.35 v3(128.8,72.3) ; v2(164,72.3) v2(173.9,72.3)
  Bottom Layer w0.7: v3(106.5,77.2) 106.52,77.2 111.42,72.3 U5.9
+24V: C25.2 C27.2 J2.3M Q3_1.3 Q3_2.3 Q3_3.3 Q3_4.3 R1.2 R20_1.2 R20_2.2 R20_3.2 R20_4.2 U5.16 | length 158.8
  Top Layer w0.7: J2.3M 63.4,84.4 71.2,84.4 82.8,72.8 C25.2 C27.2 U5.16 96.36,75 153.1,75 157.4,79.3 157.4,86.948 ; R20_1.2 139.325,87.023 139.4,86.948 145.4,86.948 ; R20_2.2 145.325,87.023 145.4,86.948 ; R20_3.2 151.325,87.023 151.4,86.948 ; R20_4.2 157.325,87.023 157.4,86.948 ; R1.2@169.225,90.057 166.985,87.818 166.985,87.768 166.165,86.948 163.325,86.948 157.4,86.948 ; 145.4,86.948 151.4,86.948 ; 151.4,86.948 Q3_4.3 157.4,86.948
ACB: J2.3C R29.2 | length 52.3
  Top Layer w0.3: J2.3C 58.975,113.525 58.975,120.248 74.227,135.5 89.2,135.5 89.21,135.49 R29.2@96.8,135.49
BOOT: R5.1 U1.60 | length 15.3
  Top Layer w0.381: R5.1 138.03,124.443 139.373,123.1 v1(139.4,123.1) ; v1(144.47,123.13) 144.47,116.266 144.693,116.043 U1.60
  Bottom Layer w0.381: v1(139.4,123.1) 139.415,123.115 144.455,123.115 v1(144.47,123.13)
CAN_H1: D3_1.1 J2.2E T1_1.2 | length 41.8
  Top Layer w0.381: v1(64.1,105.4) 64.159,105.4 64.625,105.866 76.975,105.866 77.765,105.075 93.75,105.075 94.39,104.435 D3_1.1 ; D3_1.1@96.925,104.425 97.575,105.075 100.85,105.075 101.2,104.725 T1_1.2
  Bottom Layer w0.381: J2.2E 62.714,107.286 62.714,106.786 v1(64.1,105.4)
CAN_H2: D3_2.1 J2.2J T1_2.2 | length 44.9
  Top Layer w0.381: v1(63.8,95.5) 64.194,95.894 71.406,95.894 79.769,87.531 93.8,87.531 94.45,86.881 D3_2.1 ; D3_2.1@96.975,86.881 97.625,87.531 100.9,87.531 101.25,87.181 T1_2.2@102,87.181
  Bottom Layer w0.381: J2.2J 62.703,97.297 62.703,96.597 63.084,96.216 v1(63.8,95.5)
CAN_L1: D3_1.2 J2.2F T1_1.4 | length 41.7
  Top Layer w0.381: J2.2F 62.5,105.303 62.853,105.656 62.853,105.753 v1(64.1,107) 64.159,107 64.694,106.465 77.175,106.465 77.965,105.675 93.779,105.675 94.438,106.335 D3_1.2 ; D3_1.2@96.925,106.325 97.575,105.675 100.85,105.675 101.19,106.016 T1_1.4@101.94,106.016
CAN_L2: D3_2.2 J2.2K T1_2.4 | length 44.7
  Top Layer w0.381: J2.2K 62.714,95.214 62.714,95.814 v1(63.7,96.8) 63.733,96.8 64.133,96.4 71.8,96.4 80.069,88.131 93.829,88.131 94.479,88.781 D3_2.2 ; D3_2.2@96.975,88.781 97.625,88.131 100.9,88.131 101.24,88.472 T1_2.4
CAN_RX1: U1.44 U3_1.5 | length 39.3
  Top Layer w0.3: U3_1.5 122.71,106.02 123.73,105 126.19,105 v1(126.59,105.4) ; v1(149.4,119.2) 149.457,119.257 149.457,119.682 149.675,119.9 149.675,122.941 149.75,123.016 U1.44
  Bottom Layer w0.3: v1@126.61,105.42 v1(127.9,104.13) 128.27,104.5 132.1,104.5 144.6,117 146.8,117 148.97,119.17 149.37,119.17 v1(149.4,119.2)
CAN_RX2: U1.33 U3_2.5 | length 59.4
  Top Layer w0.3: U3_2.5 122.71,88.445 123.755,87.4 126.109,87.4 126.509,87.8 v1(126.59,87.8) ; v1(150.2,115.7) 150.231,115.731 150.231,116.13 155.25,121.149 U1.33
  Bottom Layer w0.3: v1@126.61,87.82 v1(127.9,86.53) 128.27,86.9 130.5,86.9 133.2,89.6 133.2,103.2 141.109,111.11 141.109,111.174 143.336,113.4 147.5,113.4 149.743,115.643 150.143,115.643 v1(150.2,115.7)
CAN_TX1: U1.45 U3_1.3 | length 38.6
  Top Layer w0.3: U3_1.3 122.71,103.48 123.73,104.5 126.124,104.5 126.554,104.07 126.57,104.07 v1(126.59,104.09) v1(127.942,105.442) ; v1(148.6,119.9) 149.074,119.9 149.25,120.076 U1.45
  Bottom Layer w0.3: v1(127.942,105.442) 128.383,105 131.9,105 144.4,117.5 146.6,117.5 148.543,119.443 148.543,119.843 v1(148.6,119.9)
CAN_TX2: U1.34 U3_2.3 | length 58.6
  Top Layer w0.3: U3_2.3 122.71,85.905 123.705,86.9 126.099,86.9 126.509,86.49 v1(126.59,86.49) ; v1@126.61,86.51 v1(127.9,87.8) ; v1(149.5,116.5) 150,116.5 154.75,121.25 U1.34
  Bottom Layer w0.3: v1(127.9,87.8) 128.3,87.4 130.3,87.4 132.7,89.8 132.7,103.4 143.2,113.9 147.3,113.9 149.47,116.07 149.47,116.47 v1(149.5,116.5)
DC/DC: J2.3D R30.2 | length 74.7
  Top Layer w0.3: J2.3D 58.525,111.475 58.525,120.399 74.226,136.1 103.09,136.1 104.265,134.925 106.385,134.925 106.85,135.39 106.85,136.01 107.315,136.475 111.015,136.475 112.01,135.48 R30.2
DI3.31: C38_1.2 R25_1.1 R26_1.2 U1.8 | length 41.9
  Top Layer w0.3: v1(150.82,110.783) 150.827,110.783 151.25,111.206 U1.8 ; v1(175.593,90.1) C38_1.2@177.3,90.1 ; C38_1.2 R26_1.2 R25_1.1
  Bottom Layer w0.3: v1(150.82,110.783) 150.82,110.18 170.9,90.1 v1@175.7,90.1
DI3.32: C38_2.2 R25_2.1 R26_2.2 U1.9 | length 39
  Top Layer w0.3: v1(151.466,110.453) 151.466,110.509 151.749,110.793 U1.9@151.749,111.992 ; v1(175.7,95.1) 175.72,95.08 177.28,95.08 C38_2.2 R26_2.2 R25_2.1
  Bottom Layer w0.3: v1(151.466,110.453) 151.523,110.396 151.523,110.177 166.6,95.1 v1(175.7,95.1)
DI3.33: C38_3.2 R25_3.1 R26_3.2 U1.10 | length 36.1
  Top Layer w0.3: v1(152.193,110.32) 152.227,110.354 152.227,111.97 U1.10 ; v1(175.593,100.06) C38_3.2 R26_3.2 R25_3.1
  Bottom Layer w0.3: v1(152.193,110.32) 162.453,100.06 v1(175.593,100.06)
DI3.34: C38_4.2 R25_4.1 R26_4.2 U1.11 | length 34.3
  Top Layer w0.3: U1.11 152.75,111.25 154,110 154,107.5 156.44,105.06 C38_4.2 R26_4.2 R25_4.1
DI241: J2.3H R25_1.2 | length 180.9
  Top Layer w0.3: J2.3H 61.025,98.975 61.025,97.075 60,96.05 56.25,96.05 54,93.8 54,69.9 64.3,59.6 154.596,59.6 182.3,87.304 R25_1.2
DI242: J2.3G R25_2.2 | length 190.1
  Top Layer w0.3: J2.3G 58.975,101.475 58.975,97.475 57.975,96.475 55.575,96.475 53.2,94.1 53.2,69.6 63.9,58.9 155,58.9 183.2,87.1 183.2,92.6 182.6,93.2 182.6,93.35 182.45,93.5 R25_2.2
DI243: J2.3F R25_3.2 | length 200
  Top Layer w0.3: J2.3F 58.525,103.525 58.525,99.525 57.7,98.7 56.751,98.7 52.4,94.349 52.4,69.3 63.5,58.2 155.4,58.2 184.043,86.843 184.043,96.757 182.6,98.2 182.6,98.35 182.45,98.5 R25_3.2
DI244: J2.3E R25_4.2 | length 211.1
  Top Layer w0.3: v1(55.5,100.7) 55.5,98.7 51.6,94.8 51.6,69 63.1,57.5 155.8,57.5 184.885,86.585 184.885,100.915 182.6,103.2 182.6,103.35 182.45,103.5 R25_4.2
  Bottom Layer w0.3: v1(55.5,100.7) 55.5,102.7 56.5,103.7 58.1,103.7 58.8,104.4 58.8,106.3 J2.3E
DO1: J2.3J Q3_1.2 R24_1.2 | length 88.2
  Top Layer w0.7: v3(70.9,94.3) 84.25,80.95 131.65,80.95 134.5,83.8 R24_1.2@136.825,83.8 ; R24_1.2 R24_1.2@136.825,83.8 ; Q3_1.2 R24_1.2@136.825,83.8
  Bottom Layer w0.7: J2.3J 61.275,98.775 66.425,98.775 v3(70.9,94.3)
DO2: J2.4J Q3_2.2 R24_2.2 | length 98.4
  Top Layer w0.7: v3(68.5,94.8) 83.175,80.125 136.625,80.125 140.228,83.728 R24_2.2 Q3_2.2
  Bottom Layer w0.7: J2.4J 58.725,96.275 58.725,94.443 59.568,93.6 67.3,93.6 v3(68.5,94.8)
DO3: J2.3K Q3_3.2 R24_3.2 | length 99.4
  Top Layer w0.7: J2.3K 60.096,95 61.321,93.775 67.925,93.775 82.4,79.3 142.1,79.3 146.528,83.728 R24_3.2 Q3_3.2
DO4: J2.4K Q3_4.2 R24_4.2 | length 108.6
  Top Layer w0.7: J2.4K 59.55,92.95 67.55,92.95 70.4,90.1 82.025,78.475 147.175,78.475 152.428,83.728 R24_4.2 Q3_4.2
Gate1: R21_1.1 U1.59 | length 22.7
  Top Layer w0.2: R21_1.1 136.975,99.878 137.278,99.878 141.045,103.645 142.545,103.645 145.45,106.55 145.45,112.652 146.675,113.877 146.675,116.191 146.341,116.525 145.718,116.525 U1.59
Gate2: R21_2.1 U1.57 | length 20.4
  Top Layer w0.2: R21_2.1 142.825,103.465 145.775,106.416 145.775,112.517 147,113.742 147,116.866 146.341,117.525 145.718,117.525 U1.57
Gate3: R21_3.1 U1.55 | length 21.6
  Top Layer w0.2: U1.55 146.323,118.543 147.325,117.541 147.325,113.608 146.1,112.383 146.1,102.281 147.406,100.975 147.428,100.975 148.675,99.728 R21_3.1
Gate4: R21_4.1 U1.53 | length 28.4
  Top Layer w0.2: U1.53 146.338,119.543 146.365,119.516 146.384,119.516 147.7,118.2 147.7,113.523 146.425,112.248 146.425,102.675 146.425,102.415 147.54,101.3 147.8,101.3 153.103,101.3 154.675,99.728 R21_4.1
GND: B1.1 C1.2 C2.2 C3.2 C4.1 C5.1 C6.1 C7.1 C8.1 C9.1 C10.1 C11.1 C12.1 C13.1 C16_1.1 C16_2.1 C17_1.1 C17_2.1 C18_1.1 C18_2.1 C21.1 C22.2 C24.2 C26.1 C27.1 C28.1 C29.1 C30.1 C31.1 C32.1 C33.1 C34.1 C35.1 C36.1 C37.1 C38_1.1 C38_2.1 C38_3.1 C38_4.1 C39.1 C40.1 D2.1 J1.1 J2.2D J2.2H J2.2M J2.4M pad.0 Q4.2 R3.1 R4.1 R5.2 R6_1.1 R6_2.1 R11.2 R22_1.1 R22_2.1 R22_3.1 R22_4.1 R23_1.1 R23_2.1 R23_3.1 R23_4.1 R24_1.1 R24_2.1 R24_3.1 R24_4.1 R26_1.1 R26_2.1 R26_3.1 R26_4.1 R28.1 R31.1 R32.1 U1.12 U1.18 U1.31 U1.47 U1.63 U2.1 U3_1.2 U3_1.8 U3_2.2 U3_2.8 U4.2 U4.7 U4.8 U5.1 U5.10 U6.9 U6.14 U7.4 | length 1.2
  Top Layer w0.7: C36.1 180.49,122.31 v1(180.5,122.3)
  other v1: 135.1,82.2 141.5,82.2 147.4,82.2 153.2,82.2 153.143,96.706 159.243,96.706 141.143,96.806 147.091,96.805 165.243,101.306 158.043,107.106 156.743,108.206 144.243,111.906 161.543,113.006 153.443,113.606 156.043,114.543 144.243,114.906 176.4,116.1 180.6,116.7 176.4,118.2 180.5,120.4 176.5,120.8 157.043,123.206 146.043,123.306 145.443,127.306
GND_CAN1: C14_1.1 C15_1.1 C18_1.2 D3_1.3 J2.2G R6_1.2 U3_1.9 U3_1.10 U3_1.15 | length 32.6
  Top Layer w0.3: J2.2G 93.9,102.5
  Top Layer w0.381: D3_1.3 94.783,105.392 95.992,105.392 v1(96,105.4)
  other v2: 108.4,109.8
GND_CAN2: C14_2.1 C15_2.1 C18_2.2 D3_2.3 J2.2L R6_2.2 U3_2.9 U3_2.10 U3_2.15 | length 32.4
  Top Layer w0.381: v1(78.5,91.5) 93.555,91.5 ; D3_2.3 94.791,87.816 96.084,87.816 v1(96.1,87.8)
  Bottom Layer w0.381: J2.2L v1(78.5,91.5)
  other v2: 108.4,92.1
GND_RS485: C19.2 C20.2 C23.2 C24.1 D4.3 J2.2C R7.2 R11.1 U4.9 U4.15 | length 35.9
  Top Layer w0.3: J2.2C 89.9,112.5 95,117.6
  Top Layer w0.381: D4.3@94.775,122.8 v1(96.1,122.8)
  other v2: 108.4,127.7
IGBT_Gate: R2.1 U1.30 | length 30.9
  Top Layer w0.381: U1.30 158.798,120.543 158.841,120.5 v1(158.9,120.5) ; v1(169.3,104.485) 169.312,104.472 169.312,99.74 R2.1
  Bottom Layer w0.381: v1(158.9,120.5) 158.9,119.6 158.4,119.1 158.4,109 162.915,104.485 v1(169.3,104.485)
IGBT_Gates: J2.4L Q1.2 R4.2 | length 124.4
  Top Layer w0.7: J2.4L 59.975,89.025 67.975,89.025 80.9,76.1 151.1,76.1 v2(155.8,80.8) ; v2(163.2,88.1) 163.207,88.1 166.775,91.668 R4.2 Q1.2
  Bottom Layer w0.7: v2(155.8,80.8) 163.081,88.081 163.181,88.081 v2(163.2,88.1)
MISO: U1.22 U6.12 U7.2 | length 25.5
  Top Layer w0.3: U1.22 159.943,116.543 v1(163.17,119.77) U6.12 ; v1(169.4,107.6) 169.481,107.6 169.581,107.5 U7.2
  Bottom Layer w0.3: v1(163.17,119.77) 165.3,117.64 165.3,111.7 v1(169.4,107.6)
MOSI: U1.23 U6.11 U7.5 | length 20.2
  Top Layer w0.3: U1.23 159.343,117.043 v1(162.1,119.8) 163.34,121.04 U6.11 ; v1(164.6,111.2) 164.6,110.115 U7.5
  Bottom Layer w0.3: v1(162.1,119.8) 164.6,117.3 v1(164.6,111.2)
NetC1_1: C1.1 U1.5 Y1.2 | length 7.7
  Top Layer w0.3: C1.1 Y1.2 ; Y1.2@148,108.7 149.75,110.45 U1.5
  Top Layer w0.381: Y1.2 Y1.2@148,108.7
NetC2_1: C2.1 U1.6 Y1.1 | length 7.7
  Top Layer w0.3: U1.6 150.245,111.988 150.245,110.455 152,108.7 Y1.1 C2.1
NetC23_1: C23.1 R8.1 R9.2 | length 9.3
  Top Layer w0.381: R8.1 v1@95.315,120.685 ; v1@95.315,125.415 R9.2 C23.1
  Bottom Layer w0.381: v1(95.301,120.643) v1(95.301,125.373)
NetC25_1: C25.1 C29.2 | length 8
  Top Layer w0.7: C29.2 C25.1
NetC39_2: C39.2 R27.1 R28.2 U1.14 | length 20.1
  Top Layer w0.3: R27.1@152.27,125.72 R28.2 C39.2@157.267,125.72 ; U1.14 154.25,119.45 155.7,120.9 155.7,123.4 157.446,125.146 157.446,125.666 C39.2
NetD1_1: D1.1 J1.5 | length 15.4
  Top Layer w0.381: D1.1@142.384,131.184 143.7,132.5 155.08,132.5 J1.5
NetQ1_1: Q1.1 R2.2 R3.2 | length 4.8
  Top Layer w0.381: Q1.1 R3.2 R2.2
NetQ1_3: Q1.3 R1.1 | length 3.4
  Top Layer w0.7: Q1.3 169.325,94.498 R1.1
NetQ2_1_1: Q2_1.1 R21_1.2 R22_1.2 | length 4.8
  Top Layer w0.381: Q2_1.1 R21_1.2 R22_1.2
NetQ2_1_2: Q2_1.2 Q3_1.1 R23_1.2 | length 6.9
  Top Layer w0.381: Q3_1.1 136.925,87.898 137.085,88.057 137.085,88.157 137.725,88.798 137.725,90.978 136.975,91.728 R23_1.2 Q2_1.2
NetQ2_1_3: Q2_1.3 R20_1.1 | length 3.4
  Top Layer w0.381: Q2_1.3 139.025,94.898 139.325,94.598 R20_1.1
NetQ2_2_1: Q2_2.1 R21_2.2 R22_2.2 | length 4.8
  Top Layer w0.381: Q2_2.1 R21_2.2 R22_2.2
NetQ2_2_2: Q2_2.2 Q3_2.1 R23_2.2 | length 6.9
  Top Layer w0.381: Q3_2.1 142.925,87.898 143.085,88.057 143.085,88.157 143.725,88.798 143.725,90.978 142.975,91.728 R23_2.2 Q2_2.2
NetQ2_2_3: Q2_2.3 R20_2.1 | length 3.4
  Top Layer w0.381: Q2_2.3 145.025,94.898 145.325,94.598 R20_2.1
NetQ2_3_1: Q2_3.1 R21_3.2 R22_3.2 | length 4.8
  Top Layer w0.381: Q2_3.1 R21_3.2 R22_3.2
NetQ2_3_2: Q2_3.2 Q3_3.1 R23_3.2 | length 6.9
  Top Layer w0.381: Q3_3.1 148.925,87.898 149.085,88.057 149.085,88.157 149.725,88.798 149.725,90.978 148.975,91.728 R23_3.2 Q2_3.2
NetQ2_3_3: Q2_3.3 R20_3.1 | length 3.4
  Top Layer w0.381: Q2_3.3 151.025,94.898 151.325,94.598 R20_3.1
NetQ2_4_1: Q2_4.1 R21_4.2 R22_4.2 | length 4.8
  Top Layer w0.381: Q2_4.1 R21_4.2 R22_4.2
NetQ2_4_2: Q2_4.2 Q3_4.1 R23_4.2 | length 6.9
  Top Layer w0.381: Q3_4.1 154.925,87.898 155.085,88.057 155.085,88.157 155.725,88.798 155.725,90.978 154.975,91.728 R23_4.2 Q2_4.2
NetQ2_4_3: Q2_4.3 R20_4.1 | length 3.4
  Top Layer w0.381: Q2_4.3 157.025,94.898 157.325,94.598 R20_4.1
NetQ4_1: Q4.1 R30.1 R32.2 | length 6.7
  Top Layer w0.3: Q4.1@107.8,135.6 109.48,133.92 R32.2 R30.1
NetR7_1: R7.1 T2.1 U4.13 | length 12.7
  Top Layer w0.381: R7.1 101.76,119.505 101.76,119.85 104.05,122.14 T2.1 ; T2.1@104.3,122.15 104.31,122.159 104.635,122.159 104.975,122.5 111.326,122.5 111.651,122.175 U4.13
NetR10_2: R10.2 T2.3 U4.12 | length 12.9
  Top Layer w0.381: R10.2 101.76,126.265 101.76,125.731 104.05,123.44 T2.3 ; T2.3@104.3,123.45 104.31,123.44 104.66,123.44 105,123.1 111.306,123.1 111.651,123.445 U4.12
NetT1_1_1: T1_1.1 U3_1.13 | length 8.4
  Top Layer w0.381: T1_1.1@104.3,104.725 104.31,104.734 104.635,104.734 104.975,105.075 111.326,105.075 111.651,104.75 U3_1.13
NetT1_1_3: T1_1.3 U3_1.12 | length 8.4
  Top Layer w0.381: T1_1.3@104.3,106.025 104.31,106.015 104.66,106.015 105,105.675 111.306,105.675 111.651,106.02 U3_1.12
NetT1_2_1: T1_2.1 U3_2.13 | length 8.4
  Top Layer w0.381: T1_2.1@104.3,87.15 104.31,87.159 104.635,87.159 104.975,87.5 111.326,87.5 111.651,87.175 U3_2.13
NetT1_2_3: T1_2.3 U3_2.12 | length 8.4
  Top Layer w0.381: T1_2.3@104.3,88.45 104.31,88.44 104.66,88.44 105,88.1 111.306,88.1 111.651,88.445 U3_2.12
NetU1_24: U1.24 U7.3 | length 23.7
  Top Layer w0.3: U1.24 156.443,117.543 155.3,116.4 155.3,113.4 157.4,111.3 159.8,111.3 162.93,108.17 166.37,108.17 166.97,108.77 U7.3
NetU1_25: U1.25 U7.7 | length 17.9
  Top Layer w0.3: U1.25 157.304,118.039 159.255,118.039 v1(160.316,119.1) ; v1@162.9,107.5 v1(163,107.5) U7.7
  Bottom Layer w0.3: v1(160.316,119.1) 160.316,110.184 v1(163,107.5)
NetU1_41: U1.41 U4.4 U4.5 | length 36.9
  Top Layer w0.3: U4.4 U4.5 ; 122.11,122.8 v1(123.6,122.8) ; v1(124.557,123.643) 124.77,123.643 124.812,123.6 131.4,123.6 136.8,129 148.7,129 151.25,126.45 U1.41
  Bottom Layer w0.3: v1(123.6,122.8) 123.657,122.8 124.5,123.643 v1(124.557,123.643)
NetU1_42: U1.42 U4.6 | length 35.3
  Top Layer w0.3: U4.6 122.672,124.715 124.319,123.068 131.568,123.068 137,128.5 148.5,128.5 150.75,126.25 U1.42
NetU1_43: U1.43 U4.3 | length 34.4
  Top Layer w0.3: U4.3 122.653,120.905 124.348,122.6 131.8,122.6 137.2,128 148.3,128 150.25,126.05 U1.43
NRST: B1.2 C3.1 J1.2 U1.7 | length 43.3
  Top Layer w0.3: B1.2 137.25,114.13 138.03,113.35 C3.1 138.087,110.936 v1(141.684,110.936) ; U1.7 v1(150.75,113.7)
  Top Layer w0.381: v1(137.2,119.8) 137.2,114.28 B1.2
  Bottom Layer w0.3: v1(141.684,110.936) 143.649,112.9 149.95,112.9 v1(150.75,113.7)
  Bottom Layer w0.381: v1(137.2,119.8) 137.2,122.1 139,123.9 143.3,123.9 148.96,129.56 J1.2
RS485_A: D4.2 J2.2A R9.1 T2.4 | length 46.2
  Top Layer w0.381: J2.2A 63.494,116.506 76.29,116.506 82.884,123.1 93.829,123.1 94.479,123.75 D4.2 ; R9.1 D4.2 ; T2.4@102,123.45 101.991,123.44 101.24,123.44 100.9,123.1 97.625,123.1 96.975,123.75 D4.2
RS485_B: D4.1 J2.2B R8.2 T2.2 | length 46
  Top Layer w0.381: J2.2B 63.5,116 76.5,116 83,122.5 93.8,122.5 94.45,121.85 D4.1 ; R8.2 D4.1 ; T2.2@102,122.15 101.25,122.15 100.9,122.5 97.625,122.5 96.975,121.85 D4.1
SCK: U1.21 U6.13 U7.6 | length 18.6
  Top Layer w0.3: U1.21 160.743,116.043 161.4,116.7 ; U7.6 163.63,108.77 162.9,109.5 162.9,115.2 161.4,116.7 ; U6.13 163.2,118.5 161.4,116.7
SS1: U1.27 U6.10 | length 9.1
  Top Layer w0.3: U1.27 158.543,119.043 160.1,120.6 161.7,120.6 163.41,122.31 U6.10
SS2: U1.26 U7.1 | length 25.1
  Top Layer w0.3: U1.26 158.846,118.543 159.003,118.7 v1(159.085,118.7) ; v1(167.87,106.23) U7.1
  Bottom Layer w0.3: v1(159.085,118.7) 159.085,109.315 162.9,105.5 167.14,105.5 v1(167.87,106.23)
SWCLK: J1.3 U1.49 | length 12.3
  Top Layer w0.3: U1.49 146.376,121.543 v1(146.829,121.995)
  Bottom Layer w0.3: v1(146.829,121.995) 146.829,126.329 J1.3
SWDIO: J1.4 U1.46 | length 15.4
  Top Layer w0.3: v1(148.3,121.5) 148.75,121.95 U1.46
  Bottom Layer w0.3: v1(148.3,121.5) 148.3,121.526 147.9,121.926 147.9,126.4 151.118,129.618 152.658,129.618 J1.4
SWITCH: C40.2 J2.3B Q4.3 R29.1 R31.2 | length 57.8
  Top Layer w0.3: J2.3B 61.3,116.3 61.3,121.371 70.329,130.4 v1(85.2,130.4) ; v1(87.1,132.3) 88.72,133.92 R29.1 102.95,133.92 103.27,133.6 Q4.3
  Bottom Layer w0.3: v1(85.2,130.4) v1(87.1,132.3)
TEMP1: C30.2 J2.4A R12.1 U6.1 | length 161.1
  Top Layer w0.25: J2.4A@57.742,117.258 55.5,119.5 55.5,127.754 65.146,137.4 155.37,137.4 166.1,126.67 166.1,118.3 169.71,114.69 U6.1 C30.2 177.72,114.84 178.27,115.39 179.81,115.39 180.51,114.69 R12.1
TEMP2: C31.2 J2.4B R13.1 U6.2 | length 159.1
  Top Layer w0.25: J2.4B 54.9,117.6 54.9,127.9 64.888,137.888 155.512,137.888 166.6,126.8 166.6,119.76 170.4,115.96 U6.2 C31.2 174.48,115.2 177.126,115.2 177.691,115.765 181.825,115.765 182,115.94 R13.1
TEMP3: C32.2 J2.4C R14.1 U6.3 | length 166.3